# EAGLE board rcp2n64rgb (EAGLE 9.6.2)
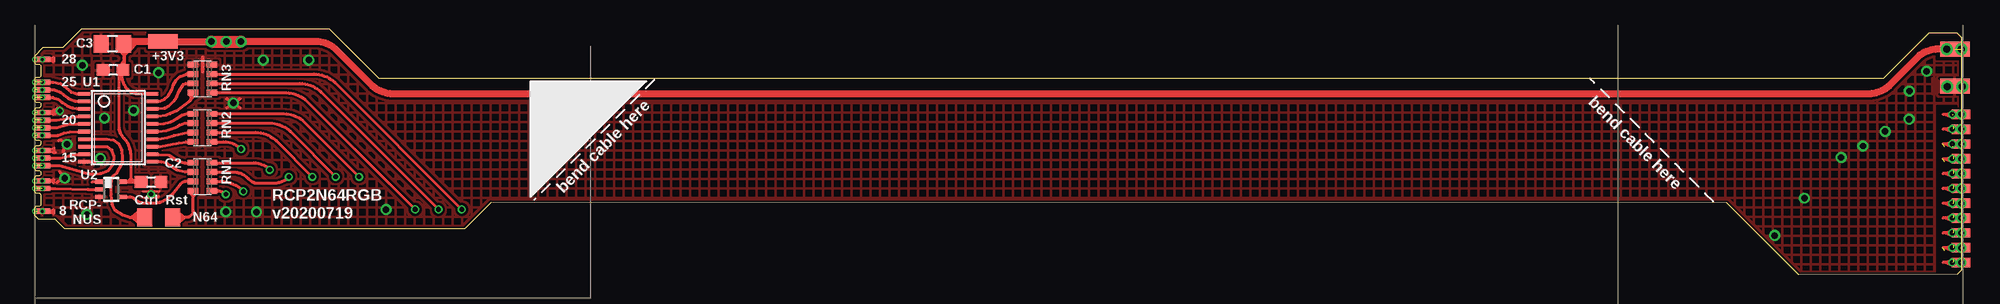
[diagram p0: board, top side]
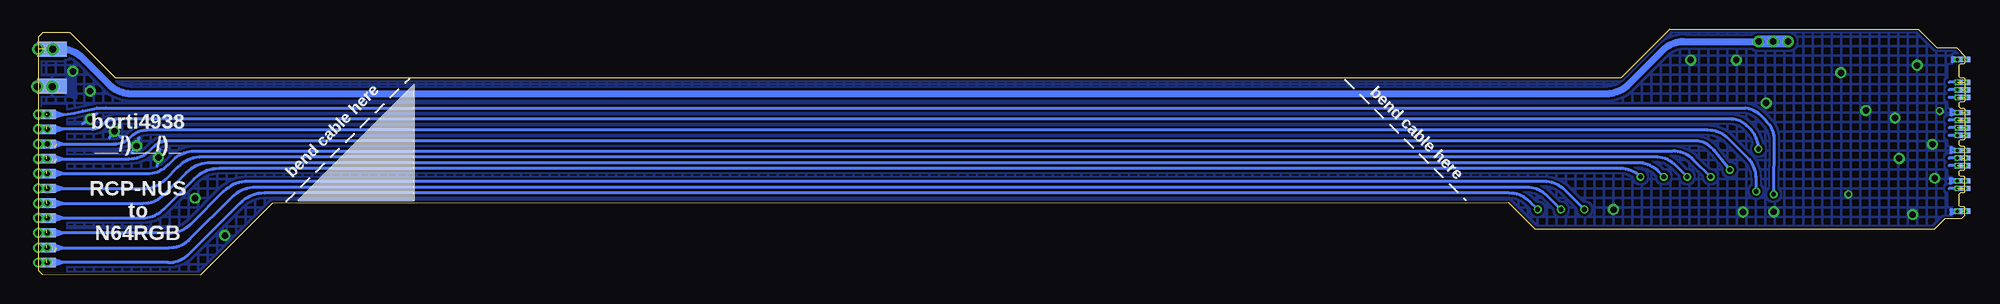
[diagram p1: board, bottom side, seen from below]

Size 164.88 x 21.05 mm. Coordinates in mm from the lower left corner, seen from the top.
Outline: 0,5.1 0.3,4.8 1.7,4.8 2.55,3.95 36.8,3.95 39.05,6.2 144.83,6.15 150.98,0 164.53,0.05 164.88,0.4 164.88,20.35 164.48,20.75 162.14,20.75 158.24,16.85 29.45,16.85 25.25,21.05 3.98,21.05 2.38,19.45 0.7,19.45 0,18.75 0,18.15 0.1,18.05 0.4,18.05 0.5,17.95 0.5,17 0.4,16.9 0.1,16.9 0,16.8 0,14.9 0.1,14.8 0.4,14.8 0.5,14.7 0.5,14.4 0.4,14.3 0.1,14.3 0,14.2 0,11.65 0.1,11.55 0.4,11.55 0.5,11.45 0.5,11.15 0.4,11.05 0.1,11.05 0,10.95 0,9.05 0.1,8.95 0.4,8.95 0.5,8.85 0.5,8.55 0.4,8.45 0.1,8.45 0,8.35 0,7.1 0.1,7 0.4,7 0.5,6.9 0.5,5.95 0.4,5.85 0.1,5.85 0,5.75 0,5.1
Copper layers (1*16): Top 0.018mm / dielectric 1.55mm / Bottom 0.018mm
Design rules "fpc": minimum track width 0.1mm, minimum drill 0.2mm, track to track 0.2mm, track to pad 0.2mm, pad to pad 0.2mm, via to via 0.2mm, smd to smd 0mil, copper to edge 0.2mm, drill to drill 0.2mm, minimum pad ring 0.125mm, minimum via ring 0.1mm, stop-mask expansion 2mil, vias tented up to drill 1mm, thermal gap 0.2mm
bKeepout: area 162.8,-0.6 to 164.5,14.5
tRestrict: area 162.7,18.4 to 165.6,20.7; area 162.8,-0.6 to 164.5,14.5
bRestrict: area 162.6,-0.6 to 164.5,14.5; area 162.7,18.4 to 165.6,20.7; area -0.4,14.4 to 1.3,17.9; area -0.4,11.2 to 1.3,13.5; area -0.4,8.6 to 1.3,10.2; area -0.4,6 to 1.3,7.6

## Footprints (pad centres in the part's own frame; a part is rotated, then mirrored left to right if it is on the bottom)
SMD0,8-1,6 = smd 0.8 x 1.6: P$1 0,0
C0603 = smd 1.1 x 1: 1 -0.85,0; 2 0.85,0
C0805 = smd 1.3 x 1.5: 1 -0.95,0; 2 0.95,0
SMD0.8SQ = smd 1.27 x 1.524: P$1 0,0
SMD0,45-1,35 = smd 1.35 x 0.45: P$1 0,0
SMD1,27-2,54 = smd 1.27 x 2.54: 1 0,0
CTS742C083 = smd 0.5 x 0.9: 1 -1.2,-0.8; 2 -0.4,-0.8; 3 0.4,-0.8; 4 1.2,-0.8; 5 1.2,0.8; 6 0.4,0.8; 7 -0.4,0.8; 8 -1.2,0.8
TSSOP20 = smd 0.305 x 0.991: 1 -2.925,-2.918; 2 -2.275,-2.918; 3 -1.625,-2.918; 4 -0.975,-2.918; 5 -0.325,-2.918; 6 0.325,-2.918; 7 0.975,-2.918; 8 1.625,-2.918; 9 2.275,-2.918; 10 2.925,-2.918; 11 2.925,2.918; 12 2.275,2.918; 13 1.625,2.918; 14 0.975,2.918; 15 0.325,2.918; 16 -0.325,2.918; 17 -0.975,2.918; 18 -1.625,2.918; 19 -2.275,2.918; 20 -2.925,2.918
DCK_R-PDSO-G5 = smd 0.35 x 0.8: 1 -0.65,-0.95; 2 0,-0.95; 3 0.65,-0.95; 4 0.65,0.95; 5 -0.65,0.95

## Placement (x,y rotation side)
/RST_A  [SMD0,8-1,6]  164.2,13.75 270 bottom
/RST_A1  [SMD0,8-1,6]  164.85,13.75 270 top
C1  0.1u  [C0603]  6.7,17.55 180 top
C2  0.1u  [C0603]  9.95,7.95 0 top
C3  22u  [C0805]  6.65,19.8 180 top
CLOCK#  [SMD0,8-1,6]  164.2,11.21 270 bottom
CLOCK#1  [SMD0,8-1,6]  164.85,11.21 270 top
CTRL_A  [SMD0,8-1,6]  164.2,12.48 270 bottom
CTRL_A1  [SMD0,8-1,6]  164.85,12.48 270 top
D0  [SMD0,8-1,6]  164.2,1.05 270 bottom
D1  [SMD0,8-1,6]  164.2,2.32 270 bottom
D2  [SMD0,8-1,6]  164.2,3.59 270 bottom
D3  [SMD0,8-1,6]  164.2,4.86 270 bottom
D4  [SMD0,8-1,6]  164.2,6.13 270 bottom
D5  [SMD0,8-1,6]  164.2,7.4 270 bottom
D6  [SMD0,8-1,6]  164.2,8.67 270 bottom
D7  [SMD0,8-1,6]  164.85,1.05 270 top
D8  [SMD0,8-1,6]  164.85,2.32 270 top
D9  [SMD0,8-1,6]  164.85,3.59 270 top
D10  [SMD0,8-1,6]  164.85,4.86 270 top
D11  [SMD0,8-1,6]  164.85,6.13 270 top
D12  [SMD0,8-1,6]  164.85,7.4 270 top
D13  [SMD0,8-1,6]  164.85,8.67 270 top
DSYNC#  [SMD0,8-1,6]  164.2,9.94 270 bottom
DSYNC#1  [SMD0,8-1,6]  164.85,9.94 270 top
E$2  [SMD0.8SQ]  9.4,4.93 0 top
E$6  [SMD0.8SQ]  11.8,4.93 0 top
E$8  [SMD0,45-1,35]  0.65,7.4 0 top
E$9  [SMD0,45-1,35]  0.65,8.05 0 top
E$10  [SMD0,45-1,35]  0.65,9.35 0 top
E$11  [SMD0,45-1,35]  0.65,10 0 top
E$12  [SMD0,45-1,35]  0.65,10.65 0 top
E$13  [SMD0,45-1,35]  0.65,11.95 0 top
E$14  [SMD0,45-1,35]  0.65,12.6 0 top
E$15  [SMD0,45-1,35]  0.65,13.25 0 top
E$16  [SMD0,45-1,35]  0.65,13.9 0 top
E$17  [SMD0,45-1,35]  0.65,15.2 0 top
E$18  [SMD0,45-1,35]  0.65,15.85 0 top
E$19  [SMD0,45-1,35]  0.65,16.5 0 top
E$22  [SMD0,45-1,35]  0.2,16.5 0 bottom
E$23  [SMD0,45-1,35]  0.2,15.85 0 bottom
E$24  [SMD0,45-1,35]  0.2,15.2 0 bottom
E$25  [SMD0,45-1,35]  0.2,13.9 0 bottom
E$26  [SMD0,45-1,35]  0.2,13.25 0 bottom
E$27  [SMD0,45-1,35]  0.2,12.6 0 bottom
E$28  [SMD0,45-1,35]  0.2,11.95 0 bottom
E$29  [SMD0,45-1,35]  0.2,10.65 0 bottom
E$30  [SMD0,45-1,35]  0.2,10 0 bottom
E$31  [SMD0,45-1,35]  0.2,9.35 0 bottom
E$32  [SMD0,45-1,35]  0.2,8.05 0 bottom
E$33  [SMD0,45-1,35]  0.2,7.4 0 bottom
E$43  [SMD0,45-1,35]  0.2,5.45 0 bottom
E$46  [SMD0,45-1,35]  0.65,18.45 0 top
E$47  [SMD0,45-1,35]  0.2,18.45 0 bottom
GND  [SMD0,45-1,35]  0.65,5.45 0 top
P_GND0  [SMD1,27-2,54]  163.69,16.16 90 bottom
P_GND1  [SMD1,27-2,54]  164.34,16.16 90 top
P_VCC_3V  [SMD1,27-2,54]  163.69,19.34 90 bottom
P_VCC_3V1  [SMD1,27-2,54]  164.34,19.34 90 top
P_VCC_3V3  [SMD1,27-2,54]  10.96,19.99 90 top
RN1  [CTS742C083]  14.35,8.4 270 top
RN2  [CTS742C083]  14.35,12.6 270 top
RN3  [CTS742C083]  14.35,16.8 270 top
U1  74VHC9151FT  [TSSOP20]  7.15,12.6 270 top
U2  SN74LVC1G17DCKR  [DCK_R-PDSO-G5]  6.53,7.33 270 top

## Library data of the parts
/RST_A /RST_A1 CLOCK# CLOCK#1 CTRL_A CTRL_A1 D0 D1-D13 DSYNC# DSYNC#1 E$2 E$6 E$8-E$19 E$22-E$33 E$43 E$46 E$47 GND = wirepad
C1-C3 = rcl
P_GND0 P_GND1 P_VCC_3V P_VCC_3V1 P_VCC_3V3 = wirepad@1
RN1-RN3 = resistor-net
U1 = sipex
U2 = texas

## Nets
3V3: C1.1 C2.1 C3.1 P_VCC_3V1.1 P_VCC_3V3.1 P_VCC_3V.1 U1.20 U2.5
#DSYNC: E$10.P$1 E$31.P$1 U1.8
#DSYNC.1: DSYNC#1.P$1 DSYNC#.P$1 RN1.8
CTRL: E$2.P$1 U1.7
CTRL.1: CTRL_A1.P$1 CTRL_A.P$1 RN2.5
D0: E$19.P$1 E$22.P$1 U1.1
D0.1: D0.P$1 D7.P$1 RN3.7
D1: E$18.P$1 E$23.P$1 U1.2
D1.1: D1.P$1 D8.P$1 RN3.6
D2: E$17.P$1 E$24.P$1 U1.3
D2.1: D2.P$1 D9.P$1 RN3.5
D3: E$15.P$1 E$26.P$1 U1.4
D3.1: D3.P$1 D10.P$1 RN2.8
D4: E$14.P$1 E$27.P$1 U1.5
D4.1: D4.P$1 D11.P$1 RN2.7
D5: E$13.P$1 E$28.P$1 U1.6
D5.1: D5.P$1 D12.P$1 RN2.6
D6: E$11.P$1 E$30.P$1 U1.9
D6.1: D6.P$1 D13.P$1 RN1.7
GND: C1.2 C2.2 C3.2 E$9.P$1 E$12.P$1 E$16.P$1 E$25.P$1 E$29.P$1 E$32.P$1 E$43.P$1 E$46.P$1 GND.P$1 P_GND0.1 P_GND1.1 RN3.1 RN3.8 U1.10 U2.3
RST: E$6.P$1 RN1.4
RST.1: /RST_A1.P$1 /RST_A.P$1 RN1.5
S$1: RN3.2 U1.19
S$2: RN3.3 U1.18
S$3: RN3.4 U1.17
S$4: RN2.1 U1.16
S$6: RN2.2 U1.15
S$7: RN2.3 U1.14
S$9: RN1.1 U1.12
S$10: RN2.4 U1.13
S$11: RN1.3 U2.4
S$12: RN1.2 U1.11
VCLK: E$8.P$1 E$33.P$1 U2.2
VCLK.1: CLOCK#1.P$1 CLOCK#.P$1 RN1.6

## Tracks (layer width: path | path; a pad name or v marks a point on that pad's centre or on a via)
3V3  (via drill 0.55, 0.6)  (1 unrouted)
  Top 0.203: P_VCC_3V1.1 v163.62,19.34
  Top 0.254: C3.1 7.65,19.8 8.05,19.4 8.05,19.18 7.67,18.8 | C3.1 7.6,19.39 | 7.67,18.8 7.67,19.62 arc45 C3.1 | C1.1 7.42,17.19 arc45 7.95,15.9 arc45 8.86,15.53 U1.20 | 7.67,18.8 7.1,19.37 7.1,19.45 | 7.22,17.18 7.22,12.75 arc45 7.7,11.6 arc-45 8.2,10.39 8.2,8.25 | U2.5 7.9,7.98 | 7.9,7.98 8.2,7.98 | 8.2,7.98 8.55,7.98 | 8.55,7.98 9.07,7.98 C2.1 | 8.2,7.98 8.2,8.25 | 8.2,8.25 7.9,7.98 | 8.2,8.25 8.55,7.98
  Top 0.305: 7.67,18.8 7.67,18.3 | 7.67,18.3 7.67,17.67 C1.1 7.55,17.25 7.22,17.18 | 7.67,18.3 7.27,17.9 7.15,17.9
  Top 0.61: P_VCC_3V1.1 162.89,19.34 arc45 161.09,18.59 158.77,16.27 arc-45 156.97,15.53 30.63,15.53 arc-45 28.83,16.27 25.85,19.25 arc45 24.06,19.99 v17.66,19.99 | v15.12,19.99 P_VCC_3V3.1 7.79,19.99 C3.1 | 8.05,19.4 8.65,20
  Top 1.016: v15.12,19.99 v17.66,19.99
  Bottom 0.127: v16.39,19.99 v17.66,19.99
  Bottom 0.61: P_VCC_3V1.1 P_VCC_3V.1 162.89,19.34 arc45 161.09,18.59 158.77,16.27 arc-45 156.97,15.53 30.63,15.53 arc-45 28.83,16.27 25.85,19.25 arc45 24.06,19.99 v17.66,19.99
  Bottom 1.016: v15.12,19.99 v17.66,19.99
  other vias: 164.89,19.34
#DSYNC  (via drill 0.25)  (2 unrouted)
  Top 0.254: E$10.P$1 2.15,9.35 3.2,9.05 4.65,8.65 5,8.65 5.63,8.69 6.28,8.92 6.68,9.45 6.8,9.98 6.8,10.14 6.6,10.7 6.22,10.95 4.26,10.95 U1.8
  Bottom 0.254: E$31.P$1 1.34,9.35
  other vias: 0.65,9.35 0,9.35
#DSYNC.1  (via drill 0.4, 0.5)  (3 unrouted)
  Top 0.254: DSYNC#1.P$1 163.31,9.94 | 164.2,10.19 163.56,9.94 164.2,9.69 | v20.1,9 arc45 18.77,9.6 RN1.8
  Bottom 0.152: DSYNC#.P$1 163.71,9.94 163.46,10.19
  Bottom 0.203: v164.11,9.94 164.11,10.19 163.34,9.94 164.11,9.69 164.2,9.69 DSYNC#.P$1 DSYNC#1.P$1 | 163.46,9.69 162.69,9.94 163.46,10.19
  Bottom 0.254: DSYNC#1.P$1 157.09,9.94 arc-45 155.29,10.69 154.98,11 arc45 153.84,11.47 22.82,11.47 arc45 21.48,10.68 v20.1,9
  other vias: 164.87,9.94
CTRL
  Top 0.254: E$2.P$1 8.75,4.93 | 8.3,4.93 8.75,4.93 | 8.3,4.93 8.07,4.93 7.55,5.1 6.9,5.5 6.65,6.05 6.55,6.9 6.55,7.6 6.6,8.2 6.75,8.5 7,8.7 7.5,9.52 7.5,10 7.43,10.66 7.4,10.8 7.2,11.2 6.7,11.55 6.17,11.62 U1.7 | 8.3,4.93 8.81,5.33 | 8.81,5.33 9.1,5.55 | 8.3,4.93 8.81,4.53 | 8.81,4.53 9.05,4.35 | 8.75,4.93 8.81,5.33 | 8.75,4.93 8.81,4.53
CTRL.1  (via drill 0.4, 0.5)  (2 unrouted)
  Top 0.203: v164.87,12.48 CTRL_A1.P$1 v164.11,12.48
  Top 0.254: CTRL_A1.P$1 163.31,12.48 | 164.2,12.73 163.56,12.48 164.2,12.23 | RN2.5 16.16,11.4 arc-45 v17.65,10.78
  Bottom 0.152: 163.46,12.73 163.85,12.73 v164.11,12.48
  Bottom 0.203: v164.11,12.48 164.11,12.73 163.34,12.48 164.11,12.23 164.2,12.23 CTRL_A.P$1 | 163.46,12.23 162.69,12.48 163.46,12.73
  Bottom 0.254: v164.11,12.48 160.23,12.48 arc-45 159.43,12.81 159.41,12.84 arc45 158.2,13.33 19.97,13.33 arc45 18.66,12.79 18.36,12.49 arc45 v17.65,10.78
  Bottom 0.406: CTRL_A.P$1 164.48,12.48
D0  (via drill 0.25)  (2 unrouted)
  Top 0.254: E$19.P$1 1.6,16.5 2.2,16.4 2.65,16.05 3.1,15.65 3.45,15.55 3.65,15.5 U1.1
  Bottom 0.254: E$22.P$1 1.34,16.5
  other vias: 0.65,16.5 0,16.5
D0.1  (via drill 0.4, 0.5)  (3 unrouted)
  Top 0.203: D7.P$1 v164.11,1.05
  Top 0.254: RN3.7 23.9,17.2 arc-45 25.69,16.46 v36.55,5.6 | D7.P$1 163.31,1.05 | 164.2,1.3 163.56,1.05 164.2,0.8
  Bottom 0.152: D0.P$1 163.71,1.05 163.46,1.3
  Bottom 0.203: v164.11,1.05 164.11,1.3 163.34,1.05 164.11,0.8 164.2,0.8 D0.P$1 | 163.46,1.3 162.69,1.05 163.46,0.8
  Bottom 0.254: v36.55,5.6 37.21,6.26 arc-45 39,7 145.53,7 arc-45 147.63,6.13 151.97,1.79 arc45 153.76,1.05 v164.11,1.05
  other vias: 164.87,1.05
D1  (via drill 0.25)  (1 unrouted)
  Top 0.254: E$18.P$1 1.65,15.85 2.2,15.65 2.5,15.4 2.9,15.1 3.45,14.9 U1.2
  Bottom 0.127: E$23.P$1 E$18.P$1
  Bottom 0.254: E$23.P$1 1.34,15.85
  other vias: 0.65,15.85 0,15.85
D1.1  (via drill 0.4, 0.4 pad 0.55, 0.5)  (3 unrouted)
  Top 0.254: RN3.6 22.7,16.4 arc-45 24.49,15.66 v34.55,5.6 | D8.P$1 163.31,2.32 | 164.2,2.57 163.56,2.32 164.2,2.07
  Bottom 0.152: D1.P$1 163.69,2.32 163.44,2.57
  Bottom 0.203: v164.11,2.32 | v164.11,2.32 164.11,2.57 163.34,2.32 164.11,2.07 164.2,2.07 D1.P$1 | 164.5,2.32 v164.11,2.32 | 163.46,2.57 163.44,2.57 162.69,2.32 163.46,2.07
  Bottom 0.254: v34.55,5.6 35.71,6.76 arc-45 37.5,7.5 146.23,7.5 arc-45 148.33,6.63 151.9,3.07 arc45 153.69,2.32 v164.11,2.32
  other vias: 164.87,2.32
D2  (via drill 0.25)  (2 unrouted)
  Top 0.254: E$17.P$1 1.55,15.2 1.95,15.05 2.35,14.75 2.75,14.5 3.25,14.3 3.55,14.25 U1.3
  Bottom 0.254: E$24.P$1 1.35,15.2
  other vias: 0.65,15.2 0,15.2
D2.1  (via drill 0.4, 0.5)  (3 unrouted)
  Top 0.203: D9.P$1 v164.11,3.59
  Top 0.254: v32.55,5.6 23.29,14.86 arc45 21.5,15.6 RN3.5 | D9.P$1 163.31,3.59 | 164.2,3.84 163.56,3.59 164.2,3.34
  Bottom 0.152: D2.P$1 v164.87,3.59
  Bottom 0.203: v164.11,3.59 164.11,3.84 163.34,3.59 163.96,3.38 163.31,3.38 | 163.31,3.38 162.69,3.59 163.46,3.84 | 163.31,3.38 163.46,3.34
  Bottom 0.254: v32.55,5.6 34.21,7.26 arc-45 36,8 146.93,8 arc-45 149.03,7.13 151.82,4.34 arc45 153.62,3.59 v164.11,3.59
D3  (via drill 0.25)  (2 unrouted)
  Top 0.254: E$15.P$1 1.9,13.25 2.7,13.4 3.55,13.55 U1.4
  Bottom 0.254: E$26.P$1 1.35,13.25
  other vias: 0.65,13.25 0,13.25
D3.1  (via drill 0.4, 0.5)  (3 unrouted)
  Top 0.203: D10.P$1 v164.11,4.86
  Top 0.254: RN2.8 21.3,13.8 arc-45 23.09,13.06 v27.75,8.4 | D10.P$1 163.31,4.86 | 164.2,5.11 163.56,4.86 164.2,4.61
  Bottom 0.152: D3.P$1 163.71,4.86 163.46,5.11
  Bottom 0.203: v164.11,4.86 164.11,5.11 163.34,4.86 164.11,4.61 164.2,4.61 D3.P$1 | 163.46,5.11 162.69,4.86 163.46,4.61
  Bottom 0.254: v27.75,8.4 arc-45 29.44,9.1 149.43,9.1 arc-45 151.53,8.23 154.16,5.61 arc45 155.95,4.86 v164.11,4.86
  other vias: 164.87,4.86
D4  (via drill 0.25)  (2 unrouted)
  Top 0.254: E$14.P$1 1.9,12.6 2.5,12.8 3,12.9 U1.5
  Bottom 0.254: E$27.P$1 1.34,12.6
  other vias: 0.65,12.6 0,12.6
D4.1  (via drill 0.4, 0.5)  (3 unrouted)
  Top 0.203: D11.P$1 v164.11,6.13
  Top 0.254: 164.81,6.15 arc45 D11.P$1 163.31,6.13 | RN2.7 20.1,13 arc-45 21.89,12.26 v25.75,8.4 | 164.2,6.38 163.56,6.13 164.2,5.88
  Bottom 0.152: D4.P$1 163.71,6.13 163.46,6.38
  Bottom 0.203: v164.11,6.13 164.11,6.38 163.34,6.13 164.11,5.88 164.2,5.88 D4.P$1 | 163.46,6.38 162.69,6.13 163.46,5.88
  Bottom 0.254: v25.75,8.4 26.21,8.86 arc-45 28,9.6 150.13,9.6 arc-45 152.23,8.73 154.09,6.88 arc45 155.88,6.13 v164.11,6.13
  other vias: 164.87,6.13
D5  (via drill 0.25)  (1 unrouted)
  Top 0.254: E$13.P$1 1.95,11.95 2.5,12.15 3,12.25 U1.6
  Bottom 0.127: E$28.P$1 E$13.P$1
  Bottom 0.254: E$28.P$1 1.36,11.95
  other vias: 0.65,11.95 0,11.95
D5.1  (via drill 0.4, 0.5)  (3 unrouted)
  Top 0.203: D12.P$1 v164.11,7.4
  Top 0.254: RN2.6 18.9,12.2 arc-45 20.69,11.46 v23.75,8.4 | D12.P$1 163.31,7.4 | 164.2,7.65 163.56,7.4 164.2,7.15
  Bottom 0.152: D5.P$1 163.71,7.4 163.46,7.15
  Bottom 0.203: v164.11,7.4 164.11,7.65 163.34,7.4 164.11,7.15 164.2,7.15 D5.P$1 | 163.46,7.15 162.69,7.4 163.46,7.65
  Bottom 0.254: v23.75,8.4 24.71,9.36 arc-45 26.5,10.1 150.83,10.1 arc-45 152.93,9.23 154.01,8.14 arc45 155.81,7.4 v164.11,7.4
  other vias: 164.87,7.4
D6  (via drill 0.25)  (1 unrouted)
  Top 0.254: E$11.P$1 2.2,10 2.95,10.2 3.5,10.3 U1.9
  Bottom 0.127: E$30.P$1 E$11.P$1
  Bottom 0.254: E$30.P$1 1.35,10
  other vias: 0.65,10 0,10
D6.1  (via drill 0.4, 0.5)  (2 unrouted)
  Top 0.203: D13.P$1 v164.11,8.67
  Top 0.254: D13.P$1 163.31,8.67 | 164.2,8.92 163.56,8.67 164.2,8.42 | RN1.7 17.06,8.8 arc-45 18.15,8.35 18.3,8.2 arc45 19.15,7.85 20.42,7.85 arc45 v21.75,8.4
  Bottom 0.152: v164.11,8.67 D6.P$1 163.71,8.67 163.46,8.92
  Bottom 0.203: v164.11,8.67 164.11,8.92 163.34,8.67 164.11,8.42 164.2,8.42 D6.P$1 | 163.46,8.92 162.69,8.67 163.46,8.42
  Bottom 0.254: v21.75,8.4 23.21,9.86 arc-45 25,10.6 151.53,10.6 arc-45 153.32,9.86 153.76,9.42 arc45 155.56,8.67 D6.P$1 D13.P$1
  other vias: 164.87,8.67
GND  (via drill 0.25, 0.4, 0.55, 0.6)  (3 unrouted)
  Top 0.203: P_GND1.1 v163.67,16.14 | 1.65,10.44 1.65,10.85 1.2,10.64 1.65,10.44 | 1.65,10.44 1.77,10.49 | v9.95,6.9 9.7,7.15 9.3,7.15 | v9.95,6.9 10.2,7.15 10.65,7.15 | v9.95,6.9 9.65,6.6 9.4,6.6 | v9.95,6.9 10,6.9 10.26,6.64 10.54,6.64 10.6,6.7
  Top 0.254: E$46.P$1 0.33,18.45 | v0,8.05 E$9.P$1 0.33,8.05 | 1.23,8.03 1.28,8.05 | 1.28,8.05 1.62,8.21 1.62,7.9 1.28,8.05 | 1.92,14.25 1.17,13.9 1.62,13.74 1.62,13.75 | 1.92,14.25 1.62,13.75 | U1.10 4.89,9.68 arc45 v5.61,9.98 | 2.1,8.85 v2.56,8.28 1.9,7.9 | 2.4,10.55 v2.76,11.19 2.2,11.55 2.05,11.5 | v16.99,14.72 17.6,15.1 16.4,14.3 | v16.99,14.72 17.6,14.3 | v16.99,14.72 16.4,15.1 | v2.15,14.05 1.62,13.75 | v2.15,14.05 2.15,14.3 1.92,14.25 | v2.15,14.05 1.92,14.25 | 1.18,18.45 1.62,18.65 1.62,18.24 1.18,18.45 | 1.23,5.41 1.62,5.59 1.62,5.23 1.23,5.41
  Top 0.29: 14.35,17.41 14.35,18.65
  Bottom 0.127: E$25.P$1 E$16.P$1
  Bottom 0.254: 0.7,8.05 1.25,7.86 1.25,8.25 E$9.P$1 | 159.83,13.8 v160.41,13.33 161.08,12.95 | v158.36,12.28 158.78,11.7 | v158.36,12.28 157.93,12.85 | v158.36,12.28 157.83,11.8 | 156.88,10.45 v156.45,11.04 156.23,11.75 | 154.48,10.75 v154.6,10.05 154.73,9.3 | E$12.P$1 1.2,10.9 1.2,10.46 E$12.P$1 | E$16.P$1 1.2,14.15 1.2,13.71 E$16.P$1 | 1.2,5.6 1.2,5.2 GND.P$1 1.2,5.6 | E$46.P$1 1.07,18.64 1.07,18.26 E$46.P$1
  Bottom 0.305: v0,18.45 E$46.P$1
  other vias: 0,13.9 0.65,13.9 0.65,18.45 4.45,5.16 0,5.45 0.65,5.45 0.65,8.05 0.65,10.65 0,10.65 164.94,16.14 10.6,17.31 30.07,5.6 5.96,13.44 16.36,5.4 18.97,5.37 161.92,17.44 160.44,15.74 151.45,6.57 4.07,17.96 19.55,18.41 23.45,18.41 148.9,3.37 8.46,14.09
  pour Bottom (hatched): 0,1.69 148.49,1.69 151.03,-0.86 164.74,-0.86 164.74,21.37 0,21.37
  pour Top (hatched): 0,1.69 148.49,1.69 151.03,-0.86 164.74,-0.86 164.74,21.37 0,21.37
  pour Top (no thermals): 163.7,16.14 162.48,16.8 162.48,15.53
  pour Bottom (no thermals): 163.6,16.14 161.7,17.17 161.75,16.57 161.7,15.19
RST
  Top 0.254: E$6.P$1 12.55,4.93 | 12.55,4.93 12.82,4.93 | 12.82,4.93 12.2,5.45 12.55,4.93 | 12.82,4.93 12.15,4.35 12.55,4.93 | 12.82,4.93 12.98,4.93 arc45 13.4,5.1 arc45 13.55,5.46 13.55,6.7 | RN1.4 13.55,6.7 | 13.55,6.7 13.85,7.2 | 13.55,6.7 13.25,7.2
RST.1  (via drill 0.4, 0.5)  (1 unrouted)
  Top 0.127: /RST_A1.P$1
  Top 0.203: /RST_A1.P$1 164.5,13.75
  Top 0.254: /RST_A1.P$1 v164.11,13.75 163.56,13.75 | 163.56,13.75 163.31,13.75 | 163.56,13.75 164.2,14 | 163.56,13.75 164.2,13.5 | 15.26,7.2 RN1.5 15.63,7.2 arc-45 v16.35,6.9
  Bottom 0.127: /RST_A1.P$1 164.5,13.75
  Bottom 0.203: v164.11,13.75 164.11,14 163.34,13.75 164.11,13.5 | 164.5,13.75 | 164.5,13.75 v164.11,13.75 | 163.46,14 162.69,13.75 163.46,13.5 164.11,13.5 | 164.11,13.5 v164.11,13.75
  Bottom 0.254: v164.87,13.75 162.69,13.75 161.78,13.85 161.03,14.05 159.83,14.3 159.08,14.3 18.75,14.3 arc45 16.96,13.11 16.85,13 arc45 16.3,11.67 v16.35,6.9
S$1
  Top 0.254: U1.19 10.68,14.88 11.1,15.05 11.4,15.33 11.75,15.9 11.85,16.25 12.11,16.7 12.42,17 12.99,17.2 RN3.2
S$2
  Top 0.254: U1.18 10.57,14.23 11.1,14.3 11.5,14.5 11.85,14.85 12.15,15.25 12.35,15.75 12.7,16.3 12.9,16.4 RN3.3
S$3
  Top 0.254: U1.17 10.56,13.57 11.2,13.65 11.6,13.8 12.1,14.05 12.8,14.55 13.3,14.95 13.43,15.16 | 13.43,15.16 13.55,15.35 RN3.4 13.43,15.16 | 13.43,15.16 13.85,15.45 | 13.43,15.16 13.25,15.55
S$4
  Top 0.254: U1.16 10.55,12.93 11.05,12.95 11.6,13.1 12.15,13.4 12.6,13.7 13,13.8 RN2.1
S$6
  Top 0.254: U1.15 10.59,12.28 11.25,12.35 12,12.6 12.4,12.85 12.85,13 RN2.2
S$7
  Top 0.254: U1.14 10.59,11.62 11.35,11.75 11.9,11.95 13.05,12.2 RN2.3
S$9
  Top 0.254: U1.12 10.57,10.32 11.45,10.25 12.05,9.9 12.45,9.7 12.85,9.6 RN1.1
S$10
  Top 0.254: U1.13 10.72,10.98 12.33,11.3 12.95,11.4 RN2.4
S$11
  Top 0.254: RN1.3 12.91,8 arc45 12.55,7.85 11.75,6.9 11.6,6.75 arc-45 10.15,6.15 9.39,6.15 arc-45 8.55,6.5 arc45 8.13,6.68 U2.4
S$12
  Top 0.254: RN1.2 12.85,8.8 12.25,8.95 11.75,9.25 11.2,9.6 10.85,9.65 U1.11
S$13
  Top 0.254: 5.65,7.95 4.9,7.95
VCLK  (via drill 0.25)  (2 unrouted)
  Top 0.254: E$8.P$1 1.75,7.4 4.55,7.33 U2.2
  Bottom 0.254: E$33.P$1 1.35,7.4
  other vias: 0.65,7.4 0,7.4
VCLK.1  (via drill 0.4, 0.5)  (4 unrouted)
  Top 0.203: CLOCK#1.P$1 v164.11,11.21
  Top 0.254: CLOCK#1.P$1 163.31,11.21 | 164.2,11.46 163.56,11.21 164.2,10.96 | RN1.6 15.95,8 arc-45 17.74,7.26 v17.85,7.15
  Bottom 0.203: v164.11,11.21 164.11,11.46 163.34,11.21 163.91,11.02 | 163.91,11.02 164.11,10.96 | 163.46,10.96 162.69,11.21 163.46,11.46 | CLOCK#.P$1 164.2,11.02 163.91,11.02
  Bottom 0.254: v164.11,11.21 158.4,11.21 arc-45 156.98,11.8 156.98,11.8 arc45 155.55,12.39 21.99,12.39 arc45 20.2,11.65 18.59,10.04 arc45 17.85,8.25 v17.85,7.15
  other vias: 164.87,11.21

## Text on the board
tPlace: 28 | +3V3 | 25 | RN3 | bend cable here | 20 | RN2 | 15 | RN1 | bend cable here | Ctrl | Rst | 8 | RCP- / NUS | N64
bPlace: bend cable here | bend cable here
tNames: RCP2N64RGB / v20200719
bNames: borti4938 / __/)__/)_ / / RCP-NUS / to / N64RGB